# EAGLE board Panel-1 (EAGLE 9.6.2)
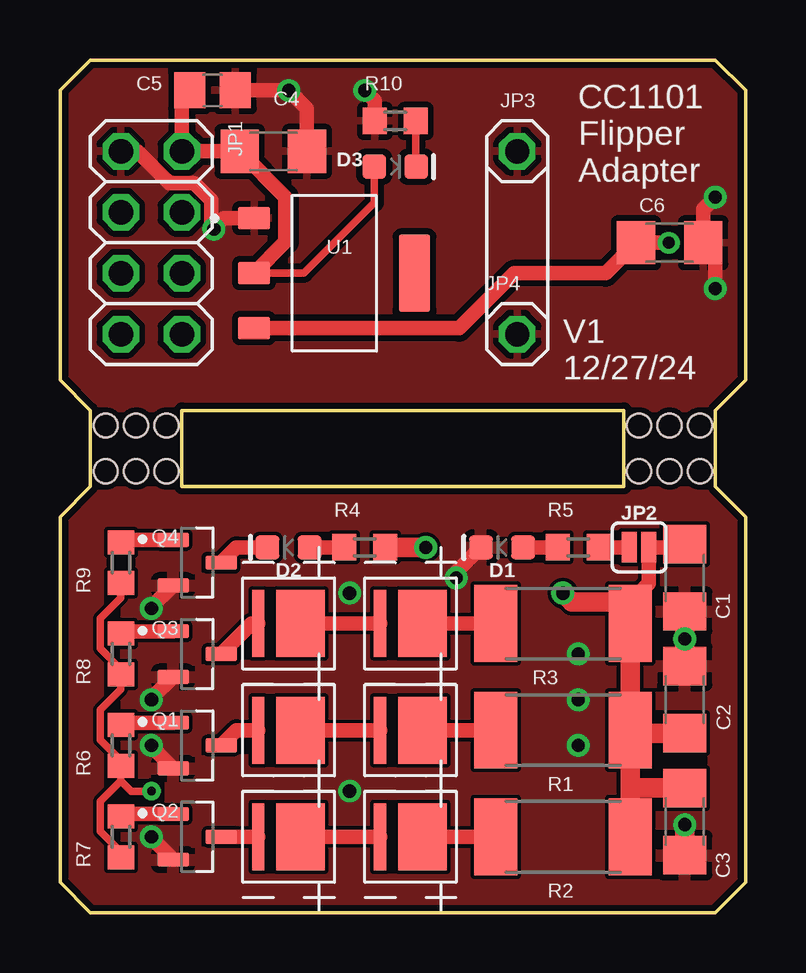
[diagram p0: board, top side]
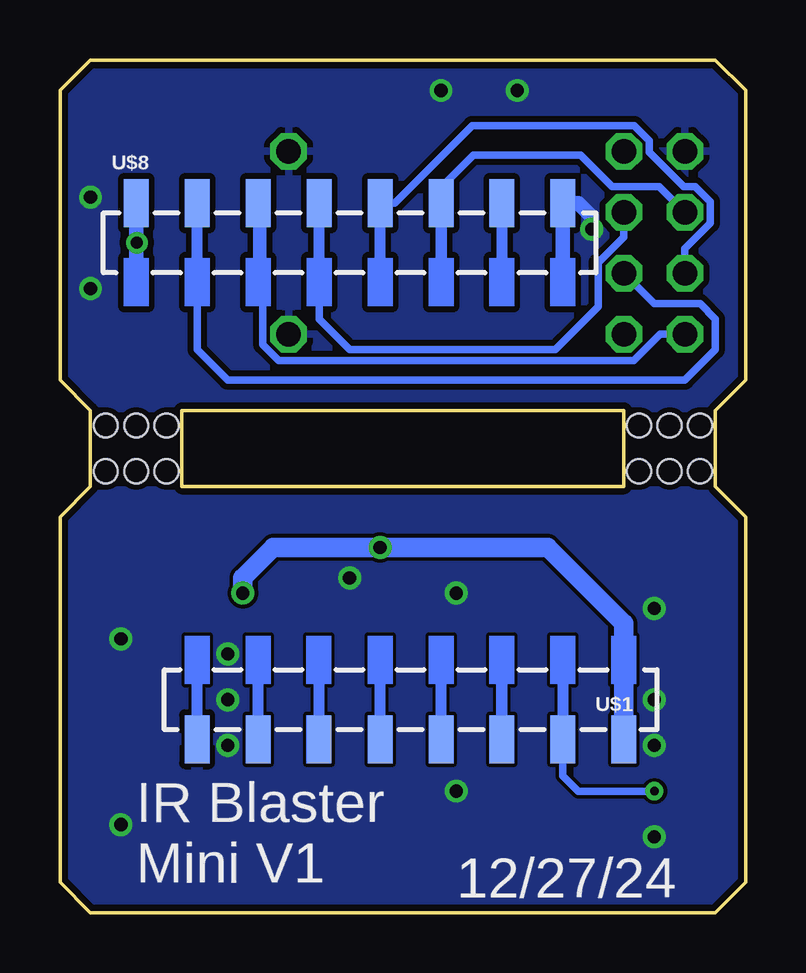
[diagram p1: board, bottom side, seen from below]

Size 28.57 x 35.56 mm. Coordinates in mm from the lower left corner, seen from the top.
Outline: 0,16.51 0,1.27 1.27,0 27.3,0 28.57,1.27 28.57,16.51 27.3,17.78 27.3,20.95 28.57,22.23 28.57,34.29 27.3,35.56 1.27,35.56 0,34.29 0,22.23 1.27,20.95 1.27,17.78 0,16.51
Outline: 23.5,17.78 5.08,17.78 5.08,20.95 23.5,20.95 23.5,17.78
Copper layers (1*16): Top 0.035mm / dielectric 1.5mm / Bottom 0.035mm
Design rules "default *": minimum track width 6mil, minimum drill 0.35mm, track to track 6mil, track to pad 6mil, pad to pad 6mil, via to via 6mil, smd to smd 6mil, copper to edge 10mil, drill to drill 6mil, minimum pad ring 10mil, minimum via ring 8mil, stop-mask expansion 4mil, vias tented up to drill 0mil, thermal gap 10mil
Holes 1 mm at 1.91,20.32 3.17,20.32 4.45,20.32 1.91,18.41 3.17,18.41 4.45,18.41 26.67,18.41 25.4,18.41 24.13,18.41 24.13,20.32 25.4,20.32 26.67,20.32

## Footprints (pad centres in the part's own frame; a part is rotated, then mirrored left to right if it is on the bottom)
C3216 = smd 1.6 x 1.8: 1 -1.4,0; 2 1.4,0
C0805 = smd 1.3 x 1.5: 1 -0.95,0; 2 0.95,0
LED-0603 = smd 1 x 1: A -0.877,0; C 0.877,0
2X04 = drill 1.016 octagon: 1 -3.81,-1.27; 2 -3.81,1.27; 3 -1.27,-1.27; 4 -1.27,1.27; 5 1.27,-1.27; 6 1.27,1.27; 7 3.81,-1.27; 8 3.81,1.27
SMT-JUMPER_2_NC_PASTE_SILK = smd 0.635 x 1.27: 1 -0.406,0; 2 0.406,0
1X01 = drill 1.016 octagon: 1 0,0
SOT95P240X120-3N = smd 1.32 x 0.6: 1 -1,0.95; 2 -1,-0.95; 3 1,0
R2512 = smd 1.8 x 3.2: 1 -2.8,0; 2 2.8,0
R0603 = smd 1 x 1.1: 1 -0.85,0; 2 0.85,0
SOT229P700X180-4N = smd 1.31 x 0.93: 1 -3.345,2.29; 2 -3.345,0; 3 -3.345,-2.29 | smd 1.31 x 3.24: 4 3.345,0
LEFT-H1-SMD = smd 1 x 2: 1 0,1.65; 2 2.54,1.65; 3 5.08,1.65; 4 7.62,1.652; 5 10.16,1.65; 6 12.7,1.652; 7 15.24,1.65; 8 17.78,1.652
XSSYSE03-EMC3838A-H90 = smd 2.032 x 2.794: P$1 -0.496,0 | smd 0.508 x 2.794: P$2 1.27,0

## Placement (x,y rotation side)
C1  22uF  [C3216]  26.04,13.97 270 top
C2  22uF  [C3216]  26.04,8.89 90 top
C3  22uF  [C3216]  26.04,3.81 270 top
C4  22uF  [C3216]  8.89,31.75 0 top
C5  100nF  [C0805]  6.35,34.29 0 top
C6  22uF  [C3216]  25.4,27.94 0 top
D1  Green  [LED-0603]  18.41,15.24 180 top
D2  Blue  [LED-0603]  9.53,15.24 180 top
D3  Green  [LED-0603]  13.97,31.11 0 top
JP1  [2X04]  3.81,27.94 270 top
JP2  JUMPER-SMT_2_NC_PASTE_SILK  [SMT-JUMPER_2_NC_PASTE_SILK]  24.13,15.24 0 top
JP3  [1X01]  19.05,31.75 0 top
JP4  [1X01]  19.05,24.13 0 top
Q1  MMBT2222A  [SOT95P240X120-3N]  5.71,6.99 0 top
Q2  MMBT2222A  [SOT95P240X120-3N]  5.71,3.17 0 top
Q3  MMBT2222A  [SOT95P240X120-3N]  5.71,10.79 0 top
Q4  MMBT2222A  [SOT95P240X120-3N]  5.71,14.61 0 top
R1  5R1  [R2512]  20.95,7.62 0 top
R2  5R1  [R2512]  20.95,3.17 0 top
R3  5R1  [R2512]  20.95,12.06 0 top
R4  1K  [R0603]  12.7,15.24 0 top
R5  1K  [R0603]  21.59,15.24 0 top
R6  1K  [R0603]  2.54,6.99 90 top
R7  1K  [R0603]  2.54,3.17 90 top
R8  1K  [R0603]  2.54,10.79 90 top
R9  1K  [R0603]  2.54,14.61 90 top
R10  1K  [R0603]  13.97,33.02 0 top
U1  AMS1117-3.3  [SOT229P700X180-4N]  11.43,26.67 0 top
U$1  LEFT-H1-SMD  [LEFT-H1-SMD]  5.08,8.89 180 bottom
U$2  XSSYSE03-EMC3838A-H90  [XSSYSE03-EMC3838A-H90]  9.53,7.62 180 top
U$3  XSSYSE03-EMC3838A-H90  [XSSYSE03-EMC3838A-H90]  14.61,7.62 180 top
U$4  XSSYSE03-EMC3838A-H90  [XSSYSE03-EMC3838A-H90]  14.61,3.17 180 top
U$5  XSSYSE03-EMC3838A-H90  [XSSYSE03-EMC3838A-H90]  9.53,3.17 180 top
U$6  XSSYSE03-EMC3838A-H90  [XSSYSE03-EMC3838A-H90]  9.53,12.06 180 top
U$7  XSSYSE03-EMC3838A-H90  [XSSYSE03-EMC3838A-H90]  14.61,12.06 180 top
U$8  LEFT-H1-SMD  [LEFT-H1-SMD]  25.4,27.94 0 bottom

## Library data of the parts
C1-C6 = rcl; SPICEPREFIX: C
D1 D3 = SparkFun-LED; PROD_ID: DIO-00821
D2 = SparkFun-LED; PROD_ID: DIO-08575
JP1 JP3 JP4 = pinhead
JP2 = SparkFun-Jumpers
Q1-Q4 = MMBT2222A; MANUFACTURER: Diotec; MAXIMUM_PACKAGE_HEIGHT: 1.20mm; PARTREV: 2024-03-11; SNAPEDA_PACKAGE_ID: 124619; STANDARD: IPC 7351B
R1-R10 = rcl; SPICEPREFIX: R
U1 = AMS1117-3.3; AVAILABILITY: Not in stock; CHECK_PRICES: https://www.snapeda.com/parts/AMS1117-3.3/Advanced+Monolithic+Systems/view-part/?ref=eda; DESCRIPTION: Sot223/Pkg 1-Amp 3.3-Volt Low Drop Out Voltage Regulatator; MF: Advanced Monolithic Systems; MP: AMS1117-3.3; PACKAGE: SOT-223 Seeed Technology; PRICE: None; SNAPEDA_LINK: https://www.snapeda.com/parts/AMS1117-3.3/Advanced+Monolithic+Systems/view-part/?ref=snap
U$1 U$8 = Flipper-Zero-GPIO-Headers
U$2-U$7 = XSSY SE03-EMC3838A-H90

## Nets
+3V3: C4.1 C5.1 D3.A JP1.2 U1.2
+5V: C1.1 C2.1 C3.1 JP2.2 R1.2 R2.2 R3.2 R4.2 U$1.1
+5V1: C6.1 U1.3 U$8.1
GND: C1.2 C2.2 C3.2 D1.C Q1.2 Q2.2 Q3.2 Q4.2 U$1.8
GND1: C4.2 C5.2 C6.2 JP1.1 JP3.1 JP4.1 R10.1 U1.1 U$8.8
N$1: D1.A R5.1
N$2: Q1.1 R6.2
N$3: Q1.3 U$2.P$2
N$4: U$2.P$1 U$3.P$2
N$5: R1.1 U$3.P$1
N$6: R2.1 U$4.P$1
N$7: U$4.P$2 U$5.P$1
N$8: Q2.3 U$5.P$2
N$9: Q2.1 R7.2
N$10: Q3.1 R8.2
N$11: Q3.3 U$6.P$2
N$12: U$6.P$1 U$7.P$2
N$13: R3.1 U$7.P$1
N$14: D2.A R4.1
N$15: D2.C Q4.3
N$16: Q4.1 R9.2
N$17: JP2.1 R5.2
N$18: D3.C R10.2
N$19: R6.1 R7.1 R8.1 R9.1 U$1.2
N$20: JP1.3 U$8.6
N$21: JP1.4 U$8.4
N$22: JP1.5 U$8.5
N$23: JP1.6 U$8.2
N$24: JP1.7 U$8.3

## Tracks (layer width: path | path; a pad name or v marks a point on that pad's centre or on a via)
+3V3
  Top 0.305: U1.2 10.16,26.67 13.09,29.6 D3.A
  Top 0.61: C5.1 5.08,33.97 JP1.2 C4.1 9.39,29.84 9.39,27.98 U1.2
+5V  (via drill 0.55)
  Top 0.61: 23.75,12.96 24.54,13.74 JP2.2 25.91,15.24 C1.1 | 23.89,5.21 23.75,5.08
  Top 0.813: R2.2 23.75,5.08 23.75,6.99 | 23.75,6.99 R1.2 R3.2 23.75,12.96 21.33,12.96 v20.95,13.34 | C2.1 24.26,7.49 23.75,6.99 | C3.1 23.89,5.21 | R4.2 v15.24,15.24
  Bottom 0.813: U$1.1 5.08,12.06 8.26,15.24 v15.24,15.24 19.68,15.24 20.95,13.97 v20.95,13.34
+5V1  (via drill 0.5)
  Top 0.61: U1.3 16.63,24.38 18.92,26.67 22.73,26.67 C6.1 v25.37,27.94
  Bottom 0.61: 25.4,26.04 U$8.1 25.4,27.97 v25.37,27.94
GND  (via drill 0.55)
  Top 0.61: D1.C 16.51,14.21 v16.51,13.97 | Q2.2 3.81,3.13 v3.81,3.17 | Q1.2 3.81,6.94 v3.81,6.99 | Q3.2 3.81,8.94 v3.81,8.89 | Q4.2 3.81,12.75 v3.81,12.7
  Top 0.813: v26.04,3.68 C3.2 | C1.2 v26.04,11.43 C2.2
  other vias: 21.59,10.79 21.59,8.89 21.59,6.99 12.06,5.08 12.06,13.34
  pour Bottom (isolate 0.152): -1.27,19.05 29.84,19.05 29.84,-1.27 -1.27,-1.27
  pour Top (isolate 0.152): -0.64,18.41 29.21,18.41 29.21,-0.64 -0.64,-0.64
GND1  (via drill 0.55)
  Top 0.61: C5.2 v9.53,34.29 10.29,33.52 C4.2 | R10.1 13.12,33.87 v12.7,34.29 | v6.42,28.51 6.42,28.56 | 6.42,28.56 6.82,28.96 U1.1 | v27.3,29.84 26.8,29.34 C6.2 27.3,27.43 v27.3,26.04 | JP1.1 3.22,31.75 4.54,30.43 5.58,30.43 6.3,29.71 6.3,28.68 6.42,28.56
  Bottom 0.61: v6.42,28.51 6.42,29.02 6.99,29.59 U$8.8 7.62,26.04
  pour Top (isolate 0.254): -0.64,36.2 29.21,36.2 29.21,20.32 -0.64,20.32
  pour Bottom (isolate 0.254): -1.27,36.83 29.84,36.83 29.84,19.68 -1.27,19.68
N$1
  Top 0.61: D1.A R5.1
N$2
  Top 0.61: Q1.1 2.64,7.93 R6.2
N$3
  Top 0.61: Q1.3 7.35,7.62 U$2.P$2
N$4
  Top 0.61: U$2.P$1 U$3.P$2
N$5
  Top 0.61: U$3.P$1 R1.1
N$6
  Top 0.61: U$4.P$1 R2.1
N$7
  Top 0.61: U$4.P$2 U$5.P$1
N$8
  Top 0.61: Q2.3 U$5.P$2
N$9
  Top 0.61: Q2.1 2.81,4.12 2.71,4.03 R7.2
N$10
  Top 0.61: Q3.1 2.64,11.74 R8.2
N$11
  Top 0.61: Q3.3 7.99,12.06 U$6.P$2
N$12
  Top 0.61: U$7.P$2 U$6.P$1
N$13
  Top 0.61: U$7.P$1 R3.1
N$14
  Top 0.61: D2.A R4.1
N$15
  Top 0.61: Q4.3 7.35,15.24 D2.C
N$16
  Top 0.61: Q4.1 2.64,15.55 R9.2
N$17
  Top 0.61: R5.2 JP2.1
N$18
  Top 0.305: D3.C 14.82,31.14 R10.2
N$19  (via drill 0.35)
  Top 0.305: R9.1 2.54,13.13 1.69,12.27 1.69,11.02 2.54,10.16 R8.1 2.54,9.32 1.69,8.46 1.69,7.21 2.54,6.35 R6.1 2.54,5.51 | R7.1 2.54,2.54 1.69,3.4 1.69,4.65 2.54,5.51 | v3.81,5.08 2.97,5.08 2.54,5.51
  Bottom 0.305: U$1.2 7.62,5.71 6.99,5.08 v3.81,5.08
N$20
  Bottom 0.305: JP1.3 3.61,30.28 5.56,30.28 6.88,31.6 11.36,31.6 12.7,30.26 U$8.6
N$21
  Bottom 0.305: U$8.4 17.78,24.77 16.51,23.5 7.94,23.5 6.15,25.29 6.15,27.11 5.08,28.18 JP1.4
N$22
  Bottom 0.305: U$8.5 14.63,29.59 11.41,32.82 4.64,32.82 4.01,32.19 4.01,31.71 2.58,30.28 2.1,30.28 1.47,29.65 1.47,28.77 2.54,27.7 JP1.5
N$23
  Bottom 0.305: JP1.6 3.81,25.4 1.91,25.4 1.27,24.77 1.27,23.5 2.54,22.23 21.59,22.23 22.86,23.5 U$8.2
N$24
  Bottom 0.305: JP1.7 3.57,24.13 4.66,23.04 19.47,23.04 20.12,23.69 20.12,29.39 U$8.3

## Text on the board
tPlace: CC1101 / Flipper / Adapter | V1 / 12/27/24
bPlace: 12/27/24 | IR Blaster / Mini V1